# Altium PCB PCB1.PcbDoc
Units mil, origin at the board's own origin, x right, y up, seen from the top; angles counter-clockwise.
Board outline 6000 x 4000 mil, 2 copper layers (Top Layer, Bottom Layer); 24 components, 9 nets, 97 pads, 3 vias.
Unrouted connection lines stored in the file: 8.
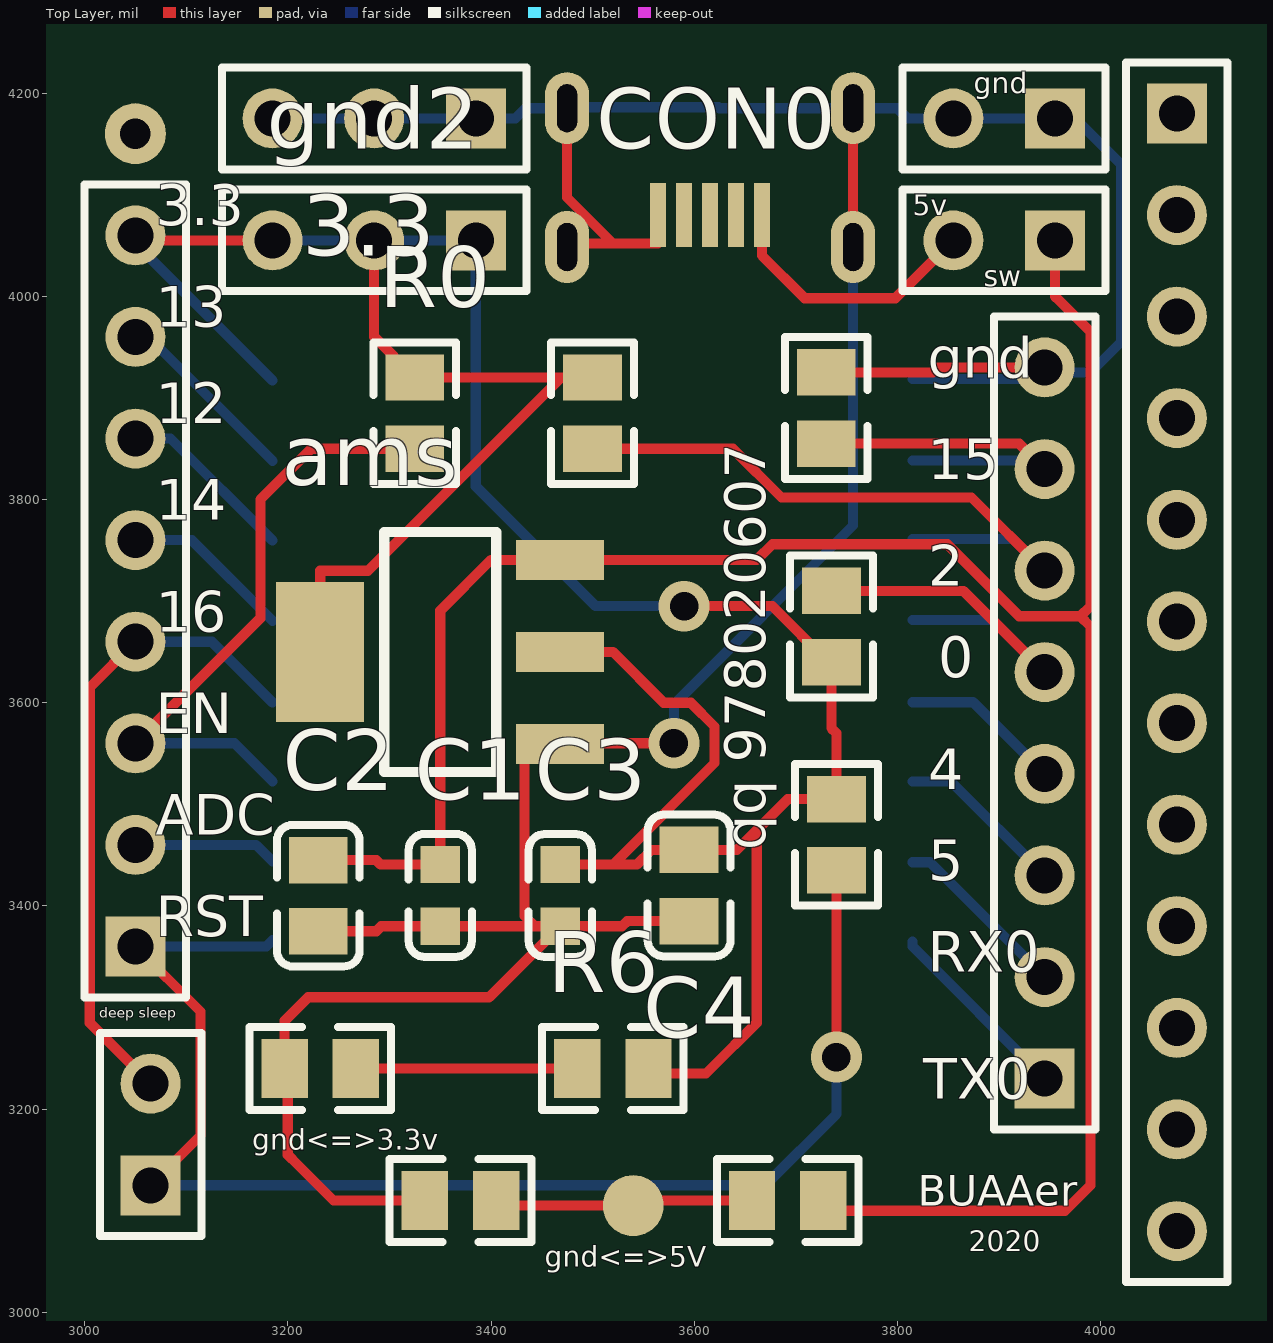
[diagram p0: Top Layer view]
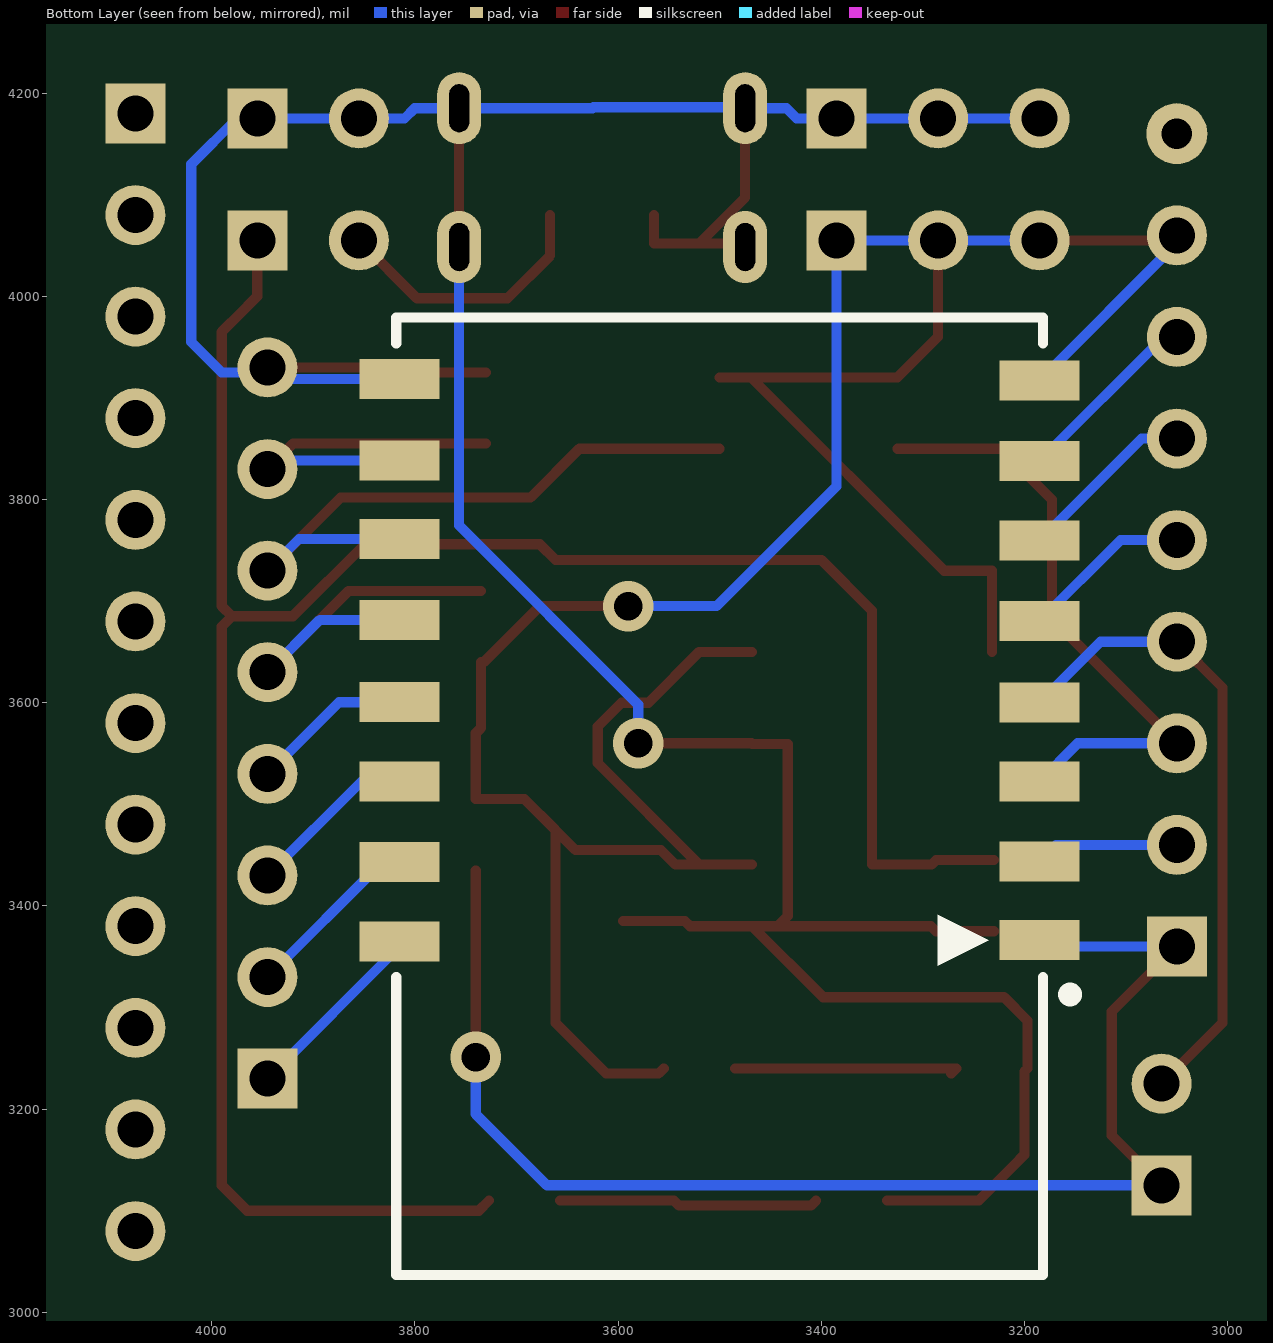
[diagram p1: Bottom Layer view, seen from below]
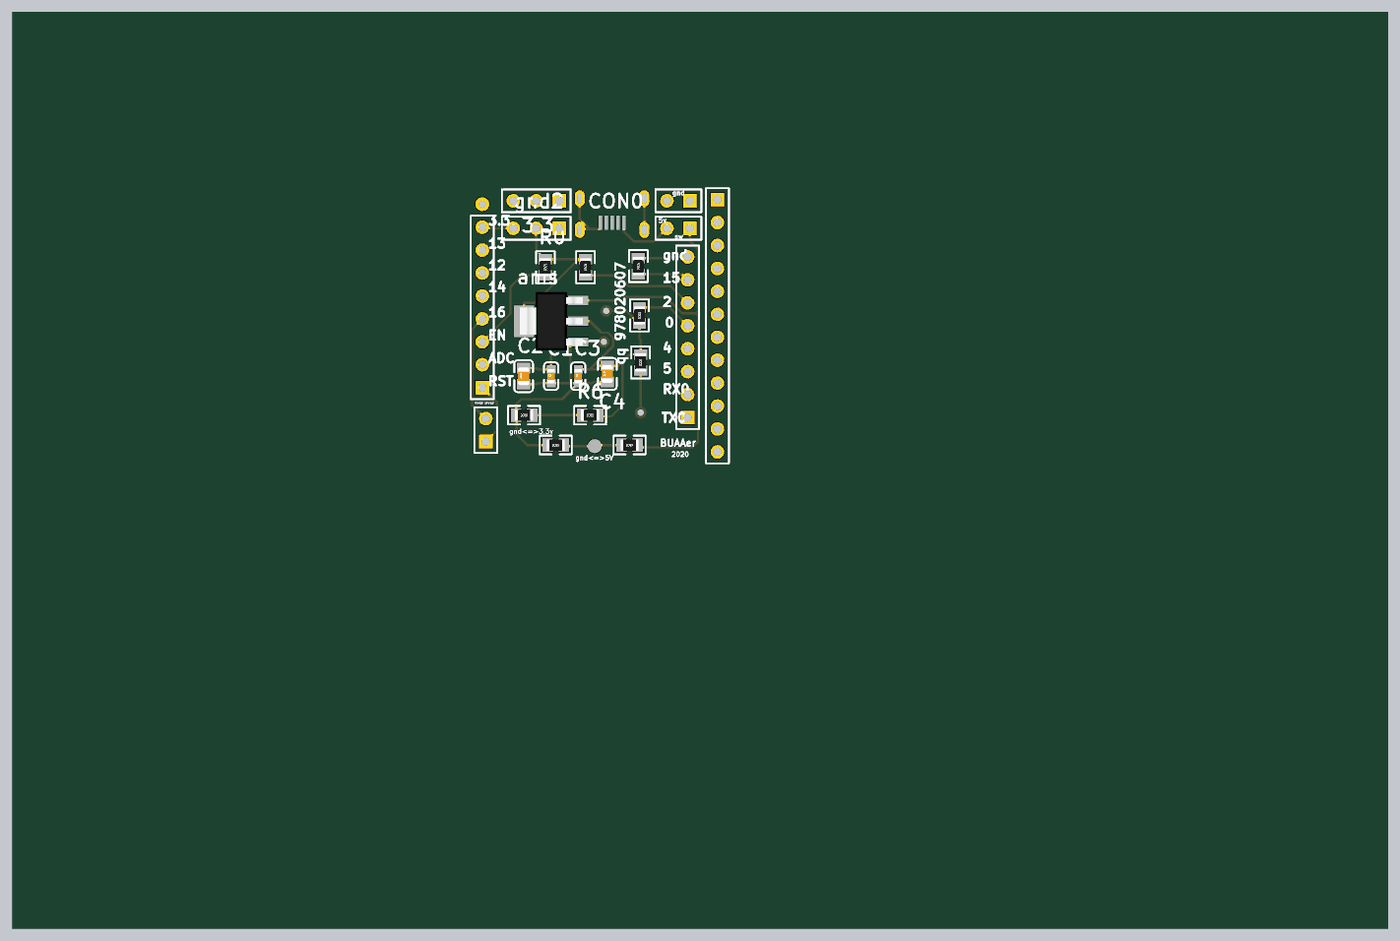
[diagram p2: 3D render of the assembled board from above, using the file's embedded part models]

## Layer stack, top to bottom
Top Solder: solder mask 0.4, Solder Resist, Dk 3.5
Top Layer: signal copper 1.4
Dielectric 1: dielectric 12.6, FR-4, Dk 4.8
Bottom Layer: signal copper 1.4
Bottom Solder: solder mask 0.4, Solder Resist, Dk 3.5

## Board outline
1000,1000 7000,1000 7000,5000 1000,5000

## Design rules (kind name [scope] priority, off if disabled: settings)
Clearance [All] p1: gap=10 ignorepadtopadclearanceinfootprint=FALSE except(0: Arc-Hole Track-Hole SMDPad-Hole THPad-Hole Via-Hole Fill-Hole Poly-Hole Region-Hole Text-Hole)
PolygonConnect [All] p1: connectstyle=Relief reliefconductorwidth=10 reliefentries=4 polygonreliefangle="90 Angle" airgapwidth=10
RoomDefinition Sheet1 [InComponentClass('Sheet1')] p1: confinementstyle=ConfineIn formatcopy=TRUE lockcomponents=FALSE outline 4125,3040 4125,4235 2985,4235 2985,3040
RoutingVias [All] p1: holewidth=28 width=50 viastyle="Through Hole" minholewidth=28 minwidth=50 maxholewidth=28 maxwidth=50
SolderMaskExpansion [All] p1: expansion=4
Width [All] p1: maxlimit=10 minlimit=10 preferedwidth=10
30 further rules are at their usual default settings.

## Classes and differential pairs
component class Sheet1: 3.3 5v ams C1 C2 C3 C4 CON0 "deep sleep" gnd gnd2 R0

## Components (designator, comment, footprint, x,y, rotation, side; value= is the part's Value field where it differs from the comment)
3.3 "Header 3" HDR1X3 3385,4055 r180 top
5v "Header 2" HDR1X2 3955,4055 r180 top
ams "AMS1117-3.3" LC-SOT-223 3350.04,3650 r0 top
C1 "10uF (106) 10% 10V" LC-0603_C 3350,3410.32 r90 top
C2 "100nF(104) 10% 50V" LC-0805_C 3230,3410.04 r90 top
C3 "10uF (106) 10% 10V" LC-0603_C 3468.15,3410.31 r90 top
C4 "100nF(104) 10% 50V" LC-0805_C 3595,3420.04 r90 top
CON0 "USB_Connector" MicroUSB 3615.59,4048.5 r270 top
"deep sleep" "Header 2" HDR1X2 3065,3125 r90 top
gnd "Header 2" HDR1X2 3955,4175 r180 top
gnd2 "Header 3" HDR1X3 3385,4175 r180 top
gnd<=>3.3v "10KΩ (1002) ±1%" LC-0805_R 3231.93,3240 r180 top (schematic designator R4)
P0 "Header 8" HDR1X8 3050,3360 r90 top
P1 "Header 8" HDR1X8 3945,3230 r90 top
R0 "10KΩ (1002) ±1%" LC-0805_R 3325,3885 r90 top
R1 "10KΩ (1002) ±1%" LC-0805_R 3500,3885 r90 top
R2 "10KΩ (1002) ±1%" LC-0805_R 3735,3675 r270 top
R3 "10KΩ (1002) ±1%" LC-0805_R 3730,3890 r90 top
R4 "10KΩ (1002) ±1%" LC-0805_R 3369.96,3110 r180 top
R4 "10KΩ (1002) ±1%" LC-0805_R 3691.96,3110 r180 top
R4 "10KΩ (1002) ±1%" LC-0805_R 3740,3470 r90 top
R6 "10KΩ (1002) ±1%" LC-0805_R 3520,3240 r180 top (schematic designator R4)
? "Comment" HDR1X12 4075,4180 r270 top
? "Comment" ESP_12 3185.08,3366.18 r0 bottom

## Footprints (in the part's own frame and the unit in brackets; to place one, negate y for a bottom-side part, rotate by r counter-clockwise, add the part's x,y. Pads: shape width x height; smd on the part's side, far side on the other; paste and mask are expansions set on the pad)
ESP_12 [mm]
  rect 2x1 smd: 1(0,0) 2(0,-1.97) 3(0,-3.97) 4(0,-5.94) 5(0,-7.98) 6(0,-9.99) 7(0,-11.98) 8(0,-13.99) 9(16,-14.03) 10(16,-11.99) 11(16,-10.03) 12(16,-8.01) 13(16,-5.95) 14(16,-3.97) 15(16,-1.95) 16(16,0.03)
  silkscreen extent -0.91,-15.57 16.08,8.37
HDR1X2 [mm] "Connector; Header; 2 Position"
  rect 1.5x1.5 hole 0.9: 1(0,0)
  round 1.5 hole 0.9: 2(2.54,0)
  silkscreen extent -1.27,-1.27 3.81,1.27
HDR1X3 [mm] "Connector; Header; 3 Position"
  rect 1.5x1.5 hole 0.9: 1(0,0)
  round 1.5 hole 0.9: 2(2.54,0) 3(5.08,0)
  silkscreen extent -1.27,-1.27 6.35,1.27
HDR1X8 [mm] "Connector; Header; 8 Position"
  rect 1.5x1.5 hole 0.9: 1(0,0)
  round 1.5 hole 0.9: 2(2.54,0) 3(5.08,0) 4(7.62,0) 5(10.16,0) 6(12.7,0) 7(15.24,0) 8(17.78,0)
  silkscreen extent -1.27,-1.27 19.05,1.27
HDR1X12 [mm] "Connector; Header; 12 Position"
  rect 1.5x1.5 hole 0.9: 1(0,0)
  round 1.5 hole 0.9: 2(2.54,0) 3(5.08,0) 4(7.62,0) 5(10.16,0) 6(12.7,0) 7(15.24,0) 8(17.78,0) 9(20.32,0) 10(22.86,0) 11(25.4,0) 12(27.94,0)
  silkscreen extent -1.27,-1.27 29.21,1.27
LC-0603_C [mm]
  rect 0.93x0.98 smd: 1(-0.77,0) 2(0.77,0)
  silkscreen extent -1.54,-0.79 1.54,0.79, body extent -0.8,-0.4 0.8,0.4, height 0.3
LC-0805_C [mm]
  rect 1.16x1.47 smd: 1(-0.89,0) 2(0.89,0)
  silkscreen extent -1.77,-1.04 1.77,1.04, body extent -1,-0.62 1,0.63, height 0.77
LC-0805_R [mm]
  rect 1.16x1.47 smd: 1(-0.89,0) 2(0.89,0)
  silkscreen extent -1.77,-1.03 1.77,1.03, body extent -1,-0.62 1,0.63, height 0.49
LC-SOT-223 [mm]
  rect 2.2x1 smd: 1(3,-2.3) 2(3,0) 3(3,2.3)
  rect 2.2x3.5 smd: 2(-3,0)
  silkscreen extent -1.4,-3 1.4,3, body extent -3.49,-3.24 3.49,3.24, height 1.64
MicroUSB [mm]
  rect 1.6x0.4 smd mask+0.05: 1(-0.8,1.3) 2(-0.8,0.65) 3(-0.8,0) 4(-0.8,-0.65) 5(-0.8,-1.3)
  oval 1.8x1.1 hole 0.5 slot 1.2 at 0 deg: GND(-3.47,3.575) GND(-3.47,-3.575) GND(0,3.575) GND(0,-3.575)

## Part data
3.3 gnd2: "Header, 3-Pin", LatestRevisionDate=17-Jul-2002, LatestRevisionNote="Re-released for DXP Platform.", Publisher="Altium Limited"
5v "deep sleep" gnd: "Header, 2-Pin", LatestRevisionDate=17-Jul-2002, LatestRevisionNote="Re-released for DXP Platform.", Publisher="Altium Limited"
ams: library part "SOT-223 AMS1117-3.3", "低压差线性稳压(LDO)", Package=SOT-223, SuppliersPartNumber=C6186, ComponentLink1Description=供?, ComponentLink1URL=http://www.szlcsc.com/product/details_6652.html, Supplier=LC
C1 C3: library part "0603 10uF (106) 10% 10V", "贴片电容", Package=0603, SuppliersPartNumber=C19702, ComponentLink1Description=供?, ComponentLink1URL=http://www.szlcsc.com/product/details_20411.html, Supplier=LC
C2 C4: library part "0805 100nF(104) 10% 50V", "贴片电容", Package=0805, SuppliersPartNumber=C49678, ComponentLink1Description=供?, ComponentLink1URL=http://www.szlcsc.com/product/details_50686.html, Supplier=LC
gnd<=>3.3v R0 R1 R2 R3 R4 R4 R4 R6: library part "0805 10KΩ (1002) 1%", "贴片电阻", Package=0805, SuppliersPartNumber=C17414, ComponentLink1Description=供?, ComponentLink1URL=http://www.szlcsc.com/product/details_18102.html, Supplier=LC
P0 P1: "Header, 8-Pin", LatestRevisionDate=17-Jul-2002, LatestRevisionNote="Re-released for DXP Platform.", Publisher="Altium Limited"

## Free pads (board coordinates)
  round 60 smd: 1(3540,3105)
  round 60 hole 30: 2(3050,4160)

## Via types
v1: diameter 50, hole 28, Top Layer to Bottom Layer, tented both sides, 3 vias

## Nets (pads, with @x,y where several pads share a name; then routed paths per layer and width w, separated by ;. In a path a pad name is that pad's centre, name@x,y a point inside that pad or via, vN(x,y) a via of type N, cw(c..) or ccw(c..) an arc to the next point about the centre after c; other vN are vias at no path point)
Net3.3_1: 3.3.1 3.3.2 3.3.3 ams.2 C3.2 C4.2 P0.8 R0.2 R1.2 R2.2 R4.2@3740,3505.04 | length 2381.1
  Top Layer w10: ams.2@3231.93,3650 3231.93,3729.93 3278.93,3729.93 3469.04,3920.04 ; 3.3.2 3285,3960.04 R0.2 3469.04,3920.04 ; C3.2 3520,3440.63 ; ams.2@3468.15,3650 3520,3650 3570,3600 3596.57,3600 3620,3576.57 3620,3540.63 3520,3440.63 ; R1.2 3469.04,3920.04 ; v1(3590,3695) 3677.05,3695 3732.09,3639.96 R2.2 3735,3575 3740,3570 3740,3505.04 3691.96,3505.04 3642,3455.08 C4.2 3557.92,3455.08 3543.47,3440.63 3520,3440.63
  Bottom Layer w10: 3.3.3 3.3.2 3.3.1 3385,3813 3503,3695 v1(3590,3695)
Net5v_1: 5v.1 5v.2 ams.3 C1.2 C2.2 CON0.1 | length 1611.7
  Top Layer w10: C2.2 3287,3445.08 3291.45,3440.63 C1.2 3350,3690.55 3400,3740.55 ams.3 3661.55,3740.55 3677,3756 3849,3756 3920,3685 3980,3685 3990,3695 3990,3965 ; CON0.1 3666.77,4040 3708.77,3998 3798,3998 5v.2
Netams_1: ams.1 C1.1 C2.1 C3.1 C4.1 CON0.5 CON0.GND gnd2.1 gnd2.2 gnd2.3 gnd.1 gnd.2 P1.8 R3.2 | length 2667.9
  Top Layer w10: C2.1 3287,3375 3292,3380 C1.1 3443,3380 ; CON0.GND@3474.84,4048.5 3474.84,4052 3520,4052 ; CON0.GND@3474.84,4185.12 3474.84,4097.16 3520,4052 ; CON0.5 3564.41,4052 3520,4052 ; v1(3580,3560) 3468.7,3560 ams.1 3433,3559.45 3433,3390 3443,3380 ; C4.1 3534,3385 3529,3380 C3.1 3443,3380 ; R3.2 3835,3925.04 3839.96,3930 P1.8 ; CON0.GND@3756.34,4048.5 CON0.GND@3756.34,4185.12
  Bottom Layer w10: gnd2.3 gnd2.2 gnd2.1 3424,4175 3434.12,4185.12 3474.84,4185.12 3474.84,4186 3624,4186 3625,4185 3756.34,4185 3756.34,4185.12 3800,4185.12 3810.12,4175 gnd.2 gnd.1 ; v1(3580,3560) 3580,3598 3756.34,3774.34 CON0.GND@3756.34,4048.5
"Netdeep sleep_1": "deep sleep.1" P0.1 R4.1@3405,3110 R4.1@3740,3434.96 R4.2@3334.92,3110 R4.2@3656.92,3110 | length 465.5
  Top Layer w10: P0.1 3114,3296 3114,3174 3065,3125 ; v1(3740,3251.23) R4.1@3740,3434.96
"Netdeep sleep_2": "deep sleep.2" P0.4 | length 478.5
  Top Layer w10: P0.4 3005,3615 3005,3285 3065,3225
NetP0_3: P0.3 R0.1 | length 463.6
  Top Layer w10: P0.3 3173,3683 3173,3800 3222.96,3849.96 R0.1
NetP1_5: P1.5 R2.1 | length 243.2
  Top Layer w10: R2.1 3864.96,3710.04 P1.5
NetP1_6: P1.6 R1.1 | length 494.7
  Top Layer w10: R1.1 3638.04,3849.96 3686,3802 3873,3802 P1.6
NetP1_7: P1.7 R3.1 | length 225.3
  Top Layer w10: R3.1 3920.04,3854.96 P1.7
pads on no net: ?.1 ?.2 ?.3 ?.4 ?.5 ?.6 ?.7 ?.8 ?.9 ?.10 ?.11 ?.12 ?.13 ?.14 ?.15 ?.16 CON0.2 CON0.3 CON0.4 gnd<=>3.3v.1 gnd<=>3.3v.2 P0.2 P0.5 P0.6 P0.7 P1.1 P1.2 P1.3 P1.4 R4.1@3727,3110 R6.1 R6.2
copper on no net: | length 6324.6
  Top Layer w10: 3050,4060 3055,4055 3185,4055 ; 3065,3125 3070,3120 ; 3271.97,3235 3266.97,3240 3484.96,3240 ; 3334.92,3110 3245,3110 3210,3145 3200,3155 3200,3236.89 3196.89,3240 3196.89,3286.89 3220,3310 3398.15,3310 3468.15,3380 ; 3405,3110 3410,3105 3540,3105 3545,3110 3656.92,3110 ; 3555.04,3240 3560.04,3235 3611.55,3235 3616.55,3240 3661.55,3285 3661.55,3474.63 3661.92,3475 3691.96,3505.04 3740,3505.04 ; 3727,3110 3737,3100 3965,3100 3990,3125 3990,3675 3980,3685 ; 3955,4055 3955,4000 3960,3995 3970,3985 3990,3965
  Bottom Layer w10: 3050,3560 3147.56,3560 3185.08,3522.48 ; 3050,3660 3125.12,3660 3185.08,3600.04 ; 3050,3760 3105.43,3760 3185.08,3680.35 ; 3050,3860 3084.57,3860 3185.08,3759.49 ; 3050,3960 3062.91,3960 3185.08,3837.83 ; 3050,4060 3050,4052.05 3185.08,3916.97 ; 3055.75,3365.75 3050,3360 3178.9,3360 3185.08,3366.18 ; 3065,3125 3670,3125 3740,3195 3740,3255 ; 3066.69,3443.31 3050,3460 3168.82,3460 3185.08,3443.74 ; 3815,3365 3815,3360 3945,3230 ; 3815,3442.95 3832.05,3442.95 3945,3330 ; 3815,3522.48 3852.52,3522.48 3945,3430 ; 3815,3600.43 3874.57,3600.43 3945,3530 ; 3815,3681.54 3893.46,3681.54 3945,3630 ; 3815,3761.06 3913.94,3761.06 3945,3730 ; 3815,3838.23 3936.77,3838.23 3945,3830 3937.2,3837.8 ; 3815,3918.54 3933.54,3918.54 3945,3930 ; 3933.11,3918.11 3945,3930 ; 3955,4175 3975,4175 4020,4130 4020,3955 3990,3925 3950,3925 3945,3930

## Silkscreen, mask and mechanical layers (free items; w line width, h text height)
Top Overlay:
  text "3.3" at 3070,4070 h40
  text "sw" at 3885,4010 h20
  text "13" at 3070,3970 h40
  text "gnd" at 3830,3920 h40
  text "12" at 3070,3875 h40
  text "15" at 3830,3820 h40
  text "14" at 3070,3780 h40
  text "2" at 3830.31,3715 h40
  text "16" at 3070,3670 h40
  text "0" at 3840,3625 h40
  text "EN" at 3070,3570 h40
  text "4" at 3830.31,3515 h40
  text "ADC" at 3070,3470 h40
  text "qq 978020607" at 3670,3455 h40 r90
  text "5" at 3830.31,3425 h40
  text "RST" at 3070,3370 h40
  text "RX0" at 3830,3335 h40
  text "TX0" at 3825.31,3210 h40
  text "BUAAer" at 3820,3105 h30
  text "2020" at 3870,3060 h20
  text "gnd<=>5V" at 3452.8,3045 h20
Mechanical 1:
  lines w10: 2985,3060 3015,3030 4000,3030 4115,3030 4125,3040 4125,4230 4120,4235 4015,4235 2995,4235 2985,4225 2985,3060

## Text inside footprints (layer, text, board x,y; h text height)
?: Mechanical 13 "ANTENNA AREA" at 3190.08,3056.18 h10 r180; Mechanical 13 "CUTOUT POLYGON" at 3190.08,3076.18 h10 r180